# Altium PCB PCB_SensorTapeFlex_v1.PcbDoc (part 1 of 4)
Units mm, origin at the board's own origin, x right, y up, seen from the top; angles counter-clockwise.
Board outline 228.71 x 24.8 mm, 2 copper layers (Top Layer, Bottom Layer); 234 components, 38 nets, 1134 pads, 768 vias.
Unrouted connection lines stored in the file: 1.
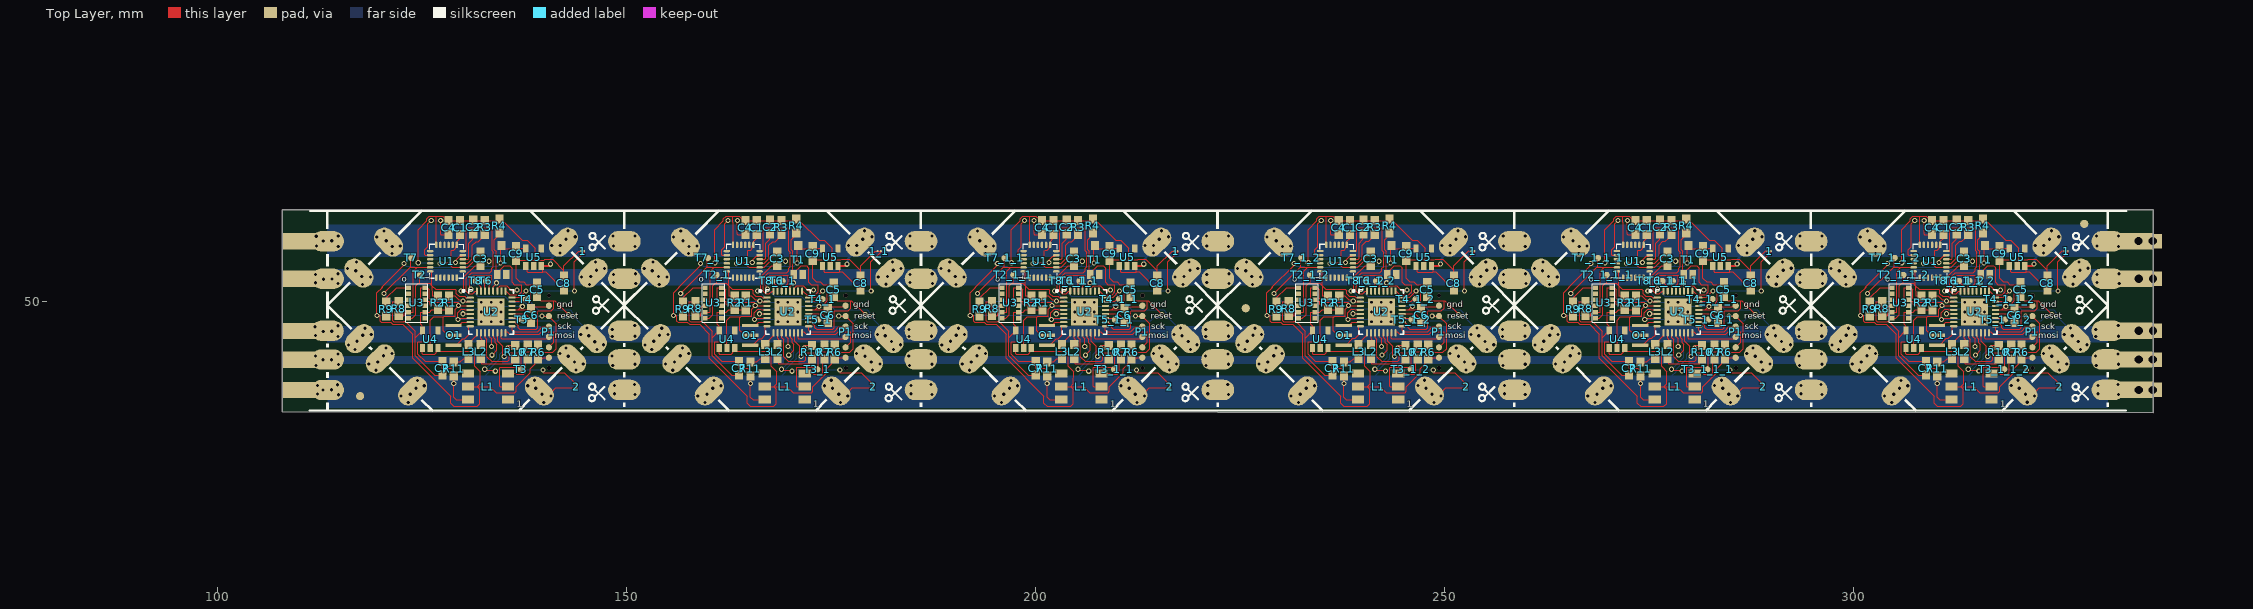
[diagram p0: Top Layer view]
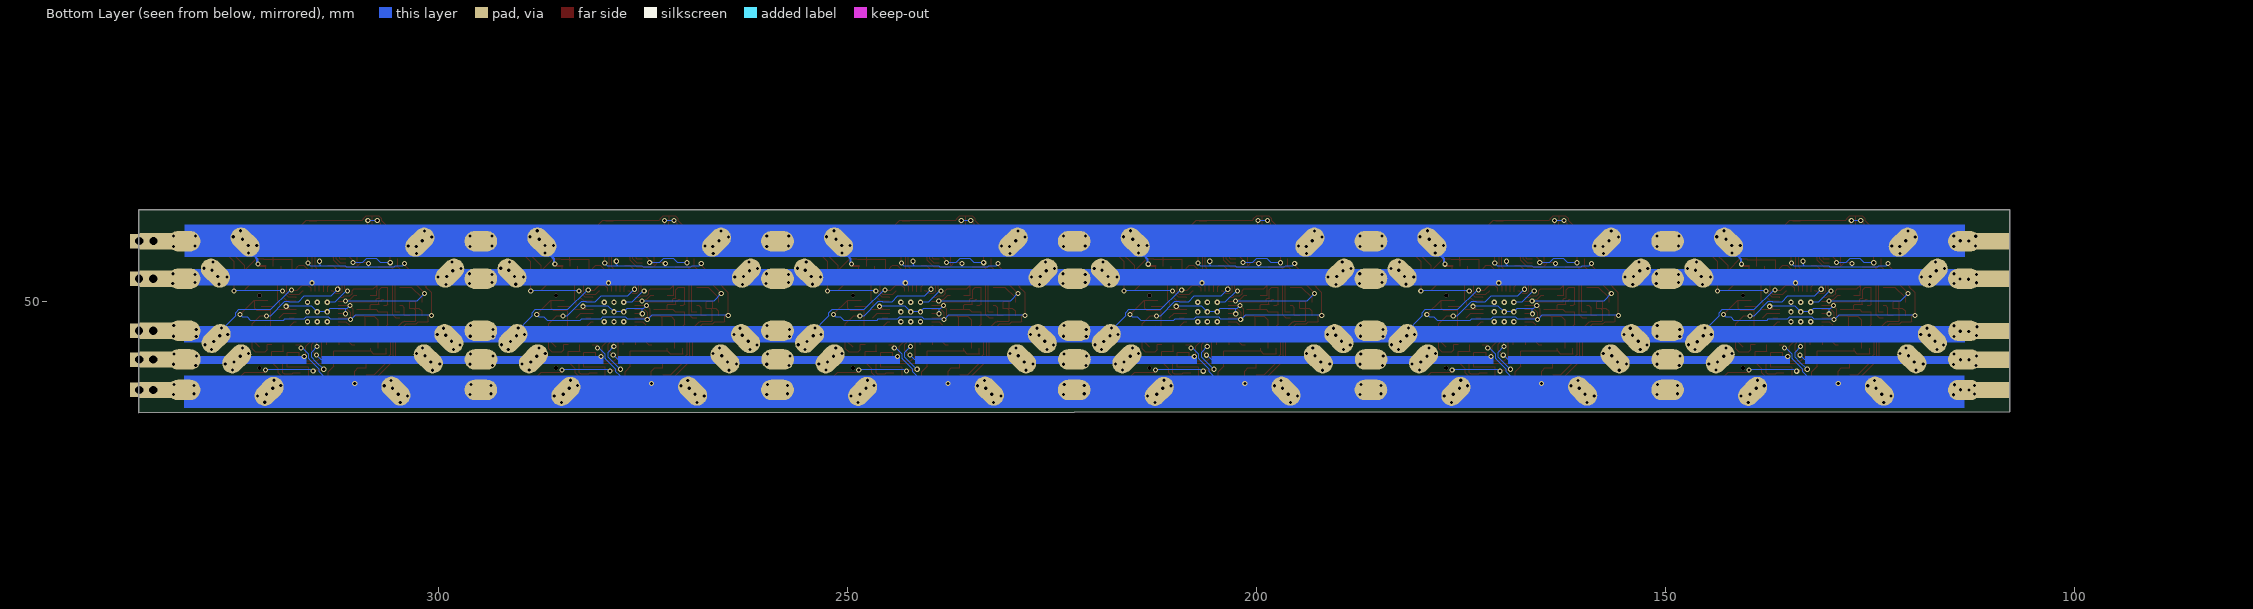
[diagram p1: Bottom Layer view, seen from below]

## Layer stack, top to bottom
Top Solder: solder mask 0.0102, Solder Resist, Dk 3.5
Top Layer: signal copper 0.0356
Dielectric1: dielectric 0.32, FR-4, Dk 4.8
Bottom Layer: signal copper 0.0356
Bottom Solder: solder mask 0.0102, Solder Resist, Dk 3.5

## Board outline
107.934,36.546 336.645,36.453 336.645,61.258 107.957,61.258 107.951,61.251

## Design rules (kind name [scope] priority, off if disabled: settings)
Clearance [All] p1: gap=0.127
MinimumSolderMaskSliver [All] p1: minsoldermaskwidth=0.025
PolygonConnect [All] p1: connectstyle=Relief reliefconductorwidth=0.254 reliefentries=4 polygonreliefangle="90 Angle" airgapwidth=0.254
RoutingVias [All] p1: holewidth=0.381 width=0.635 viastyle="Through Hole" minholewidth=0.381 minwidth=0.635 maxholewidth=0.381 maxwidth=0.635
SolderMaskExpansion [All] p1: expansion=0.102
Width [All] p1: maxlimit=0.254 minlimit=0.127 preferedwidth=0.152
29 further rules are at their usual default settings.

## Classes and differential pairs
component class schematic_sensor_tape_V4_2: 1 C1 C2 C3 C4 C5 C6 C7 C8 C9 L1 L2 L3 O1 P1 R1 R2 R3 R4 R6 R7 R8 R9 R10 R11 T1 T2 T3 T4 T5 T6 T7 T8 U1 U2 U3 U4 U5

## Components (designator, comment, footprint, x,y, rotation, side; value= is the part's Value field where it differs from the comment)
1 "SHORT" SHORT#1 327.008,56.232 r0 top
1 "SHORT" SHORT#1 254.462,56.232 r0 top
1 "SHORT" SHORT#1 290.735,56.232 r0 top
1 "SHORT" SHORT#1 218.19,56.231 r0 top
1 "SHORT" SHORT#2 145.644,56.231 r0 top
1_1 "SHORT" SHORT#1 181.917,56.231 r0 top (schematic designator 1)
2 "SHORT" SHORT#1 325.23,40.642 r90 top
2 "SHORT" SHORT#3 252.684,40.641 r90 top
2 "SHORT" SHORT#1 288.957,40.641 r90 top
2 "SHORT" SHORT#1 216.412,40.64 r90 top
2 "SHORT" SHORT#1 180.139,40.64 r90 top
2 "SHORT" SHORT#1 143.866,40.64 r90 top
C1 "0.1uF" 0603W 311.031,59.057 r90 top
C1 "0.1uF" 0603W 238.485,59.056 r90 top
C1 "0.1uF" 0603W 274.758,59.056 r90 top
C1 "0.1uF" 0603W 202.213,59.055 r90 top
C1 "0.1uF" 0603W 165.94,59.055 r90 top
C1 "0.1uF" 0603W 129.667,59.055 r90 top
C2 "0.1uF" 0603W 312.657,59.107 r90 top
C2 "0.1uF" 0603W 240.111,59.107 r90 top
C2 "0.1uF" 0603W 276.384,59.107 r90 top
C2 "0.1uF" 0603W 203.839,59.106 r90 top
C2 "0.1uF" 0603W 167.566,59.106 r90 top
C2 "0.1uF" 0603W 131.293,59.106 r90 top
C3 "10nF" 0603W 313.546,55.297 r270 top
C3 "10nF" 0603W 241,55.297 r270 top
C3 "10nF" 0603W 277.273,55.297 r270 top
C3 "10nF" 0603W 204.728,55.296 r270 top
C3 "10nF" 0603W 168.455,55.296 r270 top
C3 "10nF" 0603W 132.182,55.296 r270 top
C4 "2200pF" 0603W 309.644,59.052 r90 top
C4 "2200pF" 0603W 237.097,59.051 r90 top
C4 "2200pF" 0603W 273.37,59.051 r90 top
C4 "2200pF" 0603W 200.826,59.05 r90 top
C4 "2200pF" 0603W 164.552,59.05 r90 top
C4 "2200pF" 0603W 128.279,59.05 r90 top
C5 "0.1uF" 0603W 320.455,51.513 r270 top
C5 "0.1uF" 0603W 247.908,51.512 r270 top
C5 "0.1uF" 0603W 284.182,51.512 r270 top
C5 "0.1uF" 0603W 211.637,51.511 r270 top
C5 "0.1uF" 0603W 175.364,51.511 r270 top
C5 "0.1uF" 0603W 139.09,51.511 r270 top
C6 "0.1uF" 0603W 319.718,48.363 r270 top
C6 "0.1uF" 0603W 247.172,48.363 r270 top
C6 "0.1uF" 0603W 283.445,48.363 r270 top
C6 "0.1uF" 0603W 210.9,48.362 r270 top
C6 "0.1uF" 0603W 174.627,48.362 r270 top
C6 "0.1uF" 0603W 138.354,48.362 r270 top
C7 "10uF" 0603W 308.872,41.912 r270 top
C7 "10uF" 0603W 236.326,41.911 r270 top
C7 "10uF" 0603W 272.599,41.911 r270 top
C7 "10uF" 0603W 200.054,41.91 r270 top
C7 "10uF" 0603W 163.781,41.91 r270 top
C7 "10uF" 0603W 127.508,41.91 r270 top
C8 "10uF" 0603W 323.731,52.326 r270 top
C8 "10uF" 0603W 251.185,52.325 r270 top
C8 "10uF" 0603W 287.458,52.325 r270 top
C8 "10uF" 0603W 214.913,52.324 r270 top
C8 "10uF" 0603W 178.64,52.324 r270 top
C8 "10uF" 0603W 142.367,52.324 r270 top
C9 "10uF" 0603W 317.889,55.882 r90 top
C9 "10uF" 0603W 245.343,55.881 r90 top
C9 "10uF" 0603W 281.616,55.881 r90 top
C9 "10uF" 0603W 209.071,55.88 r90 top
C9 "10uF" 0603W 172.798,55.88 r90 top
C9 "10uF" 0603W 136.525,55.88 r90 top
L1 "WS2812" WS2812 312.047,41.277 r0 top
L1 "WS2812" WS2812 239.501,41.276 r0 top
L1 "WS2812" WS2812 275.774,41.276 r0 top
L1 "WS2812" WS2812 203.229,41.275 r0 top
L1 "WS2812" WS2812 166.956,41.275 r0 top
L1 "WS2812" WS2812 130.683,41.275 r0 top
L2 "BLUE" 0603W 313.571,43.944 r270 top
L2 "BLUE" 0603W 241.025,43.943 r270 top
L2 "BLUE" 0603W 277.298,43.943 r270 top
L2 "BLUE" 0603W 204.753,43.942 r270 top
L2 "BLUE" 0603W 168.48,43.942 r270 top
L2 "BLUE" 0603W 132.207,43.942 r270 top
L3 "RED / ORANGE" 0603W 312.073,43.944 r270 top
L3 "RED / ORANGE" 0603W 239.526,43.943 r270 top
L3 "RED / ORANGE" 0603W 275.8,43.943 r270 top
L3 "RED / ORANGE" 0603W 203.255,43.942 r270 top
L3 "RED / ORANGE" 0603W 166.982,43.942 r270 top
L3 "RED / ORANGE" 0603W 130.708,43.942 r270 top
O1 "Resonator SMD" "Resonator SMD" 310.294,46.683 r0 top
O1 "Resonator SMD" "Resonator SMD" 237.747,46.683 r0 top
O1 "Resonator SMD" "Resonator SMD" 274.02,46.683 r0 top
O1 "Resonator SMD" "Resonator SMD" 201.475,46.681 r0 top
O1 "Resonator SMD" "Resonator SMD" 165.202,46.681 r0 top
O1 "Resonator SMD" "Resonator SMD" 128.929,46.681 r0 top
P1 "6 pin smd 1.27mm female" "6pos 1.27mm"#1 313.952,49.659 r90 top
P1 "6 pin smd 1.27mm female" "6pos 1.27mm"#1 241.406,49.658 r90 top
P1 "6 pin smd 1.27mm female" "6pos 1.27mm"#1 277.679,49.658 r90 top
P1 "6 pin smd 1.27mm female" "6pos 1.27mm"#2 205.134,49.657 r90 top
P1 "6 pin smd 1.27mm female" "6pos 1.27mm"#1 168.861,49.657 r90 top
P1 "6 pin smd 1.27mm female" "6pos 1.27mm"#1 132.588,49.657 r90 top
R1 "10k" 0603W 309.697,49.906 r270 top
R1 "10k" 0603W 237.151,49.906 r270 top
R1 "10k" 0603W 273.424,49.906 r270 top
R1 "10k" 0603W 200.879,49.904 r270 top
R1 "10k" 0603W 164.606,49.905 r270 top
R1 "10k" 0603W 128.333,49.904 r270 top
R2 "10k" 0603W 308.34,49.914 r270 top
R2 "10k" 0603W 235.794,49.914 r270 top
R2 "10k" 0603W 272.067,49.914 r270 top
R2 "10k" 0603W 199.522,49.912 r270 top
R2 "10k" 0603W 163.249,49.913 r270 top
R2 "10k" 0603W 126.976,49.912 r270 top
R3 "4.7k" 0603W 314.054,59.082 r90 top
R3 "4.7k" 0603W 241.508,59.082 r90 top
R3 "4.7k" 0603W 277.781,59.082 r90 top
R3 "4.7k" 0603W 205.236,59.08 r90 top
R3 "4.7k" 0603W 168.963,59.081 r90 top
R3 "4.7k" 0603W 132.69,59.08 r90 top
R4 "10K" 0603W 315.857,59.311 r270 top
R4 "10K" 0603W 243.311,59.31 r270 top
R4 "10K" 0603W 279.584,59.31 r270 top
R4 "10K" 0603W 207.039,59.309 r270 top
R4 "10K" 0603W 170.766,59.309 r270 top
R4 "10K" 0603W 134.493,59.309 r270 top
R6 "10k" 0603W 320.582,43.893 r270 top
R6 "10k" 0603W 248.035,43.892 r270 top
R6 "10k" 0603W 284.309,43.892 r270 top
R6 "10k" 0603W 211.764,43.891 r270 top
R6 "10k" 0603W 175.491,43.891 r270 top
R6 "10k" 0603W 139.217,43.891 r270 top
R7 "1K" 0603W 319.312,43.842 r90 top
R7 "1K" 0603W 246.765,43.842 r90 top
R7 "1K" 0603W 283.039,43.842 r90 top
R7 "1K" 0603W 210.494,43.84 r90 top
R7 "1K" 0603W 174.221,43.841 r90 top
R7 "1K" 0603W 137.947,43.84 r90 top
R8 "47K" 0603W 303.538,49.151 r90 top
R8 "47K" 0603W 230.992,49.15 r90 top
R8 "47K" 0603W 267.265,49.15 r90 top
R8 "47K" 0603W 194.72,49.149 r90 top
R8 "47K" 0603W 158.447,49.149 r90 top
R8 "47K" 0603W 122.174,49.149 r90 top
R9 "47K" 0603W 302.014,49.151 r270 top
R9 "47K" 0603W 229.468,49.15 r270 top
R9 "47K" 0603W 265.741,49.15 r270 top
R9 "47K" 0603W 193.196,49.149 r270 top
R9 "47K" 0603W 156.923,49.149 r270 top
R9 "47K" 0603W 120.65,49.149 r270 top
R10 "330" 0603W 317.788,43.867 r270 top
R10 "330" 0603W 245.241,43.867 r270 top
R10 "330" 0603W 281.515,43.867 r270 top
R10 "330" 0603W 208.97,43.866 r270 top
R10 "330" 0603W 172.697,43.866 r270 top
R10 "330" 0603W 136.423,43.866 r270 top
R11 "330" 0603W 310.269,41.785 r90 top
R11 "330" 0603W 237.723,41.784 r90 top
R11 "330" 0603W 273.996,41.784 r90 top
R11 "330" 0603W 201.451,41.783 r90 top
R11 "330" 0603W 165.178,41.783 r90 top
R11 "330" 0603W 128.905,41.783 r90 top
T1 "TEMPT6000" TEMP6000 315.984,54.358 r90 top
T1 "TEMPT6000" TEMP6000 243.438,54.357 r90 top
T1 "TEMPT6000" TEMP6000 279.711,54.357 r90 top
T1 "TEMPT6000" TEMP6000 207.166,54.356 r90 top
T1 "TEMPT6000" TEMP6000 170.893,54.356 r90 top
T1 "TEMPT6000" TEMP6000 134.62,54.356 r90 top
T2 "" "TEST POINT SMD SUPER SMALL" 124.765,53.289 r0 top
T2_1 "" "TEST POINT SMD SUPER SMALL" 161.038,53.289 r0 top (schematic designator T2)
T2_1_1 "" "TEST POINT SMD SUPER SMALL" 197.311,53.289 r0 top (schematic designator T2)
T2_1_1_1 "" "TEST POINT SMD SUPER SMALL" 269.856,53.29 r0 top (schematic designator T2)
T2_1_1_2 "" "TEST POINT SMD SUPER SMALL" 306.129,53.291 r0 top (schematic designator T2)
T2_1_2 "" "TEST POINT SMD SUPER SMALL" 233.583,53.29 r0 top (schematic designator T2)
T3 "" "TEST POINT SMD SUPER SMALL" 137.084,41.758 r0 top
T3_1 "" "TEST POINT SMD SUPER SMALL" 173.357,41.758 r0 top (schematic designator T3)
T3_1_1 "" "TEST POINT SMD SUPER SMALL" 209.63,41.758 r0 top (schematic designator T3)
T3_1_1_1 "" "TEST POINT SMD SUPER SMALL" 282.175,41.759 r0 top (schematic designator T3)
T3_1_1_2 "" "TEST POINT SMD SUPER SMALL" 318.448,41.759 r0 top (schematic designator T3)
T3_1_2 "" "TEST POINT SMD SUPER SMALL" 245.902,41.759 r0 top (schematic designator T3)
T4 "" "TEST POINT SMD SUPER SMALL" 137.694,50.343 r0 top
T4_1 "" "TEST POINT SMD SUPER SMALL" 173.967,50.343 r0 top (schematic designator T4)
T4_1_1 "" "TEST POINT SMD SUPER SMALL" 210.24,50.343 r0 top (schematic designator T4)
T4_1_1_1 "" "TEST POINT SMD SUPER SMALL" 282.785,50.344 r0 top (schematic designator T4)
T4_1_1_2 "" "TEST POINT SMD SUPER SMALL" 319.059,50.345 r0 top (schematic designator T4)
T4_1_2 "" "TEST POINT SMD SUPER SMALL" 246.512,50.344 r0 top (schematic designator T4)
T5 "" "TEST POINT SMD SUPER SMALL" 137.185,47.828 r0 top
T5_1 "" "TEST POINT SMD SUPER SMALL" 173.459,47.828 r0 top (schematic designator T5)
T5_1_1 "" "TEST POINT SMD SUPER SMALL" 209.732,47.828 r0 top (schematic designator T5)
T5_1_1_1 "" "TEST POINT SMD SUPER SMALL" 282.277,47.829 r0 top (schematic designator T5)
T5_1_1_2 "" "TEST POINT SMD SUPER SMALL" 318.55,47.83 r0 top (schematic designator T5)
T5_1_2 "" "TEST POINT SMD SUPER SMALL" 246.003,47.829 r0 top (schematic designator T5)
T6 "" "TEST POINT SMD SUPER SMALL" 132.842,52.553 r0 top
T6_1 "" "TEST POINT SMD SUPER SMALL" 169.115,52.553 r0 top (schematic designator T6)
T6_1_1 "" "TEST POINT SMD SUPER SMALL" 205.388,52.553 r0 top (schematic designator T6)
T6_1_1_1 "" "TEST POINT SMD SUPER SMALL" 277.933,52.554 r0 top (schematic designator T6)
T6_1_1_2 "" "TEST POINT SMD SUPER SMALL" 314.206,52.554 r0 top (schematic designator T6)
T6_1_2 "" "TEST POINT SMD SUPER SMALL" 241.66,52.554 r0 top (schematic designator T6)
T7 "" "TEST POINT SMD SUPER SMALL" 123.698,55.372 r0 top
T7_1 "" "TEST POINT SMD SUPER SMALL" 159.971,55.372 r0 top (schematic designator T7)
T7_1_1 "" "TEST POINT SMD SUPER SMALL" 196.244,55.372 r0 top (schematic designator T7)
T7_1_1_1 "" "TEST POINT SMD SUPER SMALL" 268.789,55.373 r0 top (schematic designator T7)
T7_1_1_2 "" "TEST POINT SMD SUPER SMALL" 305.062,55.374 r0 top (schematic designator T7)
T7_1_2 "" "TEST POINT SMD SUPER SMALL" 232.516,55.373 r0 top (schematic designator T7)
T8 "" "TEST POINT SMD SUPER SMALL" 131.572,52.553 r0 top
T8_1 "" "TEST POINT SMD SUPER SMALL" 167.845,52.553 r0 top (schematic designator T8)
T8_1_1 "" "TEST POINT SMD SUPER SMALL" 204.118,52.553 r0 top (schematic designator T8)
T8_1_1_1 "" "TEST POINT SMD SUPER SMALL" 276.663,52.554 r0 top (schematic designator T8)
T8_1_1_2 "" "TEST POINT SMD SUPER SMALL" 312.936,52.554 r0 top (schematic designator T8)
T8_1_2 "" "TEST POINT SMD SUPER SMALL" 240.39,52.554 r0 top (schematic designator T8)
U1 "MPU_6500" QFN24 308.364,53.723 r90 top
U1 "MPU_6500" QFN24 235.818,53.722 r90 top
U1 "MPU_6500" QFN24 272.091,53.722 r90 top
U1 "MPU_6500" QFN24 199.546,53.721 r90 top
U1 "MPU_6500" QFN24 163.273,53.721 r90 top
U1 "MPU_6500" QFN24 127,53.721 r90 top
U2 "ATmega328P-MUR" 32M1-A_M 314.841,48.77 r0 top
U2 "ATmega328P-MUR" 32M1-A_M 242.295,48.769 r0 top
U2 "ATmega328P-MUR" 32M1-A_M 278.568,48.769 r0 top
U2 "ATmega328P-MUR" 32M1-A_M 206.023,48.768 r0 top
U2 "ATmega328P-MUR" 32M1-A_M 169.75,48.768 r0 top
U2 "ATmega328P-MUR" 32M1-A_M 133.477,48.768 r0 top
U3 "VL6180X" VL6180X 305.697,49.913 r0 top
U3 "VL6180X" VL6180X 233.151,49.912 r0 top
U3 "VL6180X" VL6180X 269.424,49.912 r0 top
U3 "VL6180X" VL6180X 196.879,49.911 r0 top
U3 "VL6180X" VL6180X 160.606,49.911 r0 top
U3 "VL6180X" VL6180X 124.333,49.911 r0 top
U4 "MIC5205_VOLTAGE_REG" SOT-23-5 306.84,45.976 r0 top
U4 "MIC5205_VOLTAGE_REG" SOT-23-5 234.294,45.975 r0 top
U4 "MIC5205_VOLTAGE_REG" SOT-23-5 270.567,45.975 r0 top
U4 "MIC5205_VOLTAGE_REG" SOT-23-5 198.022,45.974 r0 top
U4 "MIC5205_VOLTAGE_REG" SOT-23-5 161.749,45.974 r0 top
U4 "MIC5205_VOLTAGE_REG" SOT-23-5 125.476,45.974 r0 top
U5 "MIC5205_VOLTAGE_REG" SOT-23-5 319.479,56.007 r0 top
U5 "MIC5205_VOLTAGE_REG" SOT-23-5 246.933,56.007 r0 top
U5 "MIC5205_VOLTAGE_REG" SOT-23-5 283.206,56.007 r0 top
U5 "MIC5205_VOLTAGE_REG" SOT-23-5 210.661,56.006 r0 top
U5 "MIC5205_VOLTAGE_REG" SOT-23-5 174.388,56.006 r0 top
U5 "MIC5205_VOLTAGE_REG" SOT-23-5 138.115,56.006 r0 top

## Footprints (in the part's own frame and the unit in brackets; to place one, negate y for a bottom-side part, rotate by r counter-clockwise, add the part's x,y. Pads: shape width x height; smd on the part's side, far side on the other; paste and mask are expansions set on the pad)
"6pos 1.27mm"#1 [mil]
  round 30 smd paste-30: 1(-255.18,-312.9) 2(-205.22,-312.81) 3(-155.19,-312.82) 4(-105.18,-312.84) 5(-55.15,-312.85) 6(-5.14,-312.83)
"6pos 1.27mm"#2 [mil]
  round 30 smd paste-158: 1(-255.18,-312.9) 2(-205.22,-312.81) 4(-105.18,-312.84) 5(-55.15,-312.85) 6(-5.14,-312.83)
  round 30 smd paste-158 mask+4: 3(-155.19,-312.82)
32M1-A_M [mm] "QFN, 32-Leads, Body 5x5mm, Pitch 0.5mm, IPC Low Density"
  oval 0.9x0.25 smd: 1(-2.55,1.75) 2(-2.55,1.25) 3(-2.55,0.75) 4(-2.55,0.25) 5(-2.55,-0.25) 6(-2.55,-0.75) 7(-2.55,-1.25) 8(-2.55,-1.75) 17(2.55,-1.75) 18(2.55,-1.25) 19(2.55,-0.75) 20(2.55,-0.25) 21(2.55,0.25) 22(2.55,0.75) 23(2.55,1.25) 24(2.55,1.75)
  oval 0.25x0.9 smd: 9(-1.75,-2.55) 10(-1.25,-2.55) 11(-0.75,-2.55) 12(-0.25,-2.55) 13(0.25,-2.55) 14(0.75,-2.55) 15(1.25,-2.55) 16(1.75,-2.55) 25(1.75,2.55) 26(1.25,2.55) 27(0.75,2.55) 28(0.25,2.55) 29(-0.25,2.55) 30(-0.75,2.55) 31(-1.25,2.55) 32(-1.75,2.55)
  rect 3.3x3.3 smd: 33(0,0)
  silkscreen extent -3.5,-2.73 2.73,2.73, body extent -2.58,-2.58 2.58,2.58, height 1
0603W [mm]
  rect 1.1x1 smd: 1(-0.825,0) 2(0.875,0)
  body extent -0.77,-0.4 0.83,0.4, height 0.8
QFN24 [mm] "pitch 0.5mm"
  oval 0.8x0.3 smd mask+0.07: 1(-0.756,0.231) 2(-0.756,-0.269) 3(-0.756,-0.768) 4(-0.756,-1.268) 5(-0.756,-1.768) 6(-0.755,-2.268) 13(3.244,-2.268) 14(3.244,-1.768) 15(3.244,-1.269) 16(3.244,-0.769) 17(3.244,-0.269) 18(3.244,0.231)
  oval 0.3x0.8 smd mask+0.07: 7(-0.006,-3.018) 8(0.494,-3.018) 9(0.994,-3.018) 10(1.494,-3.018) 11(1.994,-3.018) 12(2.494,-3.018) 19(2.494,0.981) 20(1.994,0.981) 21(1.494,0.981) 22(0.994,0.981) 23(0.494,0.981) 24(-0.006,0.981)
  silkscreen extent -0.9,-3.16 3.38,1.12, body extent -0.76,-3.02 3.24,0.98, height 1.1
"Resonator SMD" [mm]
  rect 2x0.4 smd: 1(-0.05,-1.975) 2(-0.051,-0.775) 3(-0.051,0.425)
  body extent -0.77,-2.35 0.8,0.8, height 1.15
SHORT#1 [mil] "Just a short"
  round 10 smd paste-10 mask+0: 0(-47.05,-0.98) 1(-31.34,-1.18)
  Top Layer lines w5: -45.76,-1.26 -32.69,-1.28
SHORT#2 [mil] "Just a short"
  round 10 smd paste-10 mask+0: 0(-47.05,-0.98)
  round 10 smd paste-20 mask+0: 1(-31.34,-1.18)
  Top Layer lines w5: -45.76,-1.25 -32.69,-1.28
SHORT#3 [mil] "Just a short"
  round 10 smd paste+0 mask-10: 0(-47.05,-0.98)
  round 10 smd paste-10 mask+0: 1(-31.34,-1.18)
  Top Layer lines w5: -45.76,-1.26 -32.69,-1.28
SOT-23-5 [mm]
  rect 0.65x1 smd: 1(-0.4,-1.625) 2(0.55,-1.625) 3(1.5,-1.625) 4(1.5,0.525) 5(-0.4,0.525)
  body extent -0.77,-1.68 1.88,0.58, height 1.1
TEMP6000 [mm] "Ambient Light sensor"
  rect 1.1x1 smd: 1(2.55,-0.125)
  rect 1.1x0.8 smd: 2(-1,0.425) 3(-1,-0.675)
  body extent -1.28,-1.13 2.73,0.87, height 1.05
"TEST POINT SMD SUPER SMALL" [mil]
  round 30 smd paste-30: 0(0,0)
VL6180X [mm] "IR Proximity sensor"
  rect 0.6x0.55 smd mask+0.05: 1(-0.952,1.838) 2(-0.952,1.089) 3(-0.952,0.34) 4(-0.952,-0.41) 5(-0.952,-1.16) 6(-0.952,-1.91) 7(1.049,-1.911) 8(1.049,-1.161) 9(1.049,-0.412) 10(1.049,0.338) 11(1.049,1.087) 12(1.049,1.836)
  silkscreen extent -1.32,-2.41 1.42,2.33, body extent -1.38,-2.41 1.43,2.39, height 0.6
WS2812 [mm] "RGB Led footprint"
  rect 1.5x1 smd: 1(4.857,-3.229) 2(4.857,-1.629) 3(4.857,-0.029) 4(-0.045,-0.029) 5(-0.045,-1.629) 6(-0.045,-3.229)
  body extent -0.08,-4.13 4.92,0.87, height 1

## Part data
C1 C1 C1 C1 C1 C1 C2 C2 C2 C2 C2 C2 C3 C3 C3 C3 C3 C3 C4 C4 C4 C4 C4 C4 C5 C5 C5 C5 C5 C5 C6 C6 C6 C6 C6 C6 C7 C7 C7 C7 C7 C7 C8 C8 C8 C8 C8 C8 C9 C9 C9 C9 C9 C9: library part Capacitor, "SMD Cap 1206"
L2 L2 L2 L2 L2 L2 L3 L3 L3 L3 L3 L3: library part LED, "LED SMD 1206/0603"
O1 O1 O1 O1 O1 O1: "Build in caps"
R1 R1 R1 R1 R1 R1 R2 R2 R2 R2 R2 R2 R3 R3 R3 R3 R3 R3 R4 R4 R4 R4 R4 R4 R6 R6 R6 R6 R6 R6 R7 R7 R7 R7 R7 R7 R8 R8 R8 R8 R8 R8 R9 R9 R9 R9 R9 R9 R10 R10 R10 R10 R10 R10 R11 R11 R11 R11 R11 R11: library part Resistor
T2 T2_1 T2_1_1 T2_1_1_1 T2_1_1_2 T2_1_2 T3 T3_1 T3_1_1 T3_1_1_1 T3_1_1_2 T3_1_2 T4 T4_1 T4_1_1 T4_1_1_1 T4_1_1_2 T4_1_2 T5 T5_1 T5_1_1 T5_1_1_1 T5_1_1_2 T5_1_2 T6 T6_1 T6_1_1 T6_1_1_1 T6_1_1_2 T6_1_2 T7 T7_1 T7_1_1 T7_1_1_1 T7_1_1_2 T7_1_2 T8 T8_1 T8_1_1 T8_1_1_1 T8_1_1_2 T8_1_2: library part "Test point small"
U1 U1 U1 U1 U1 U1: "Gyro / accelerometer combo"
U2 U2 U2 U2 U2 U2: "8-bit AVR Microcontroller, 32KB Flash, 1KB EEPROM, 2KB SRAM, 32-pin MLF, Industrial Grade (-40°C to 85°C)"
U4 U4 U4 U4 U4 U4 U5 U5 U5 U5 U5 U5: "5V LDO SMD"

## Free pads (board coordinates)
  round 1 smd paste-0.762 mask+0.5: 0(117.452,38.476) 0(225.73,49.222) 0(328.242,59.537)
  rect 50x0.1 on Mech13 rot 135 paste+0 mask+0: 1(113.463,49.56)
  rect 60x0.1 on Mech13 rot 45 paste+0 mask+0: 1(113.463,49.56)
  rect 0.05x25 on Mech13 paste+0 mask+0: 1(113.465,46.688) 1(149.738,46.688) 1(186.011,46.689) 1(222.284,46.689) 1(258.556,46.69) 1(294.829,46.69) 1(331.102,46.69)
  rect 60x0.1 on Mech13 rot 135 paste+0 mask+0: 1(149.763,49.56)
  rect 50x0.1 on Mech13 rot 45 paste+0 mask+0: 1(149.763,49.56)
  rect 2.286x1.778 hole 1: 1(334.888,57.429) 1(334.892,39.233) 1(334.894,42.951) 1(334.897,52.832) 1(334.899,46.475) 1(336.617,57.429) 1(336.621,39.233) 1(336.622,42.951) 1(336.626,52.832) 1(336.628,46.475)
  rect 4x2 smd far side: 2(109.973,52.82) 2(109.977,46.441) 2(109.978,42.939) 2(109.985,57.401) 2(109.994,39.221) 2(334.6,52.832) 2(334.603,46.452) 2(334.604,42.95) 2(334.611,57.412) 2(334.62,39.233)
  rect 4x2 smd paste-4: 2(109.977,52.823) 2(109.98,46.443) 2(109.981,42.941) 2(109.988,57.403) 2(109.998,39.224) 2(334.604,52.834) 2(334.607,46.454) 2(334.608,42.952) 2(334.615,57.414) 2(334.624,39.235)
  oval 4x2.5 smd paste-4.013: 3(113.463,46.46) 3(113.471,57.405) 3(113.475,52.825) 3(113.477,42.952) 3(113.482,39.227) 3(149.738,42.96) 3(149.763,39.235) 3(149.763,46.468) 3(149.763,52.835) 3(149.763,57.416) 3(186.011,42.96) 3(186.036,39.235) 3(186.036,46.468) 3(186.036,52.835) 3(186.036,57.416) 3(222.284,42.96) 3(222.309,39.235) 3(222.309,46.468) 3(222.309,52.835) 3(222.309,57.416) 3(258.556,42.961) 3(258.581,39.236) 3(258.581,46.469) 3(258.581,52.836) 3(258.581,57.417) 3(294.829,42.961) 3(294.854,39.236) 3(294.854,46.469) 3(294.854,52.836) 3(294.854,57.417) 3(331.102,42.962) 3(331.128,39.237) 3(331.128,46.47) 3(331.128,52.837) 3(331.128,57.418)
  oval 4x2.5 smd far side: 3(113.463,46.46) 3(113.471,57.405) 3(113.475,52.825) 3(113.477,42.952) 3(113.482,39.227) 3(149.738,42.96) 3(149.763,39.235) 3(149.763,46.468) 3(149.763,52.835) 3(149.763,57.416) 3(186.011,42.96) 3(186.036,39.235) 3(186.036,46.468) 3(186.036,52.835) 3(186.036,57.416) 3(222.284,42.96) 3(222.309,39.235) 3(222.309,46.468) 3(222.309,52.835) 3(222.309,57.416) 3(258.556,42.961) 3(258.581,39.236) 3(258.581,46.469) 3(258.581,52.836) 3(258.581,57.417) 3(294.829,42.961) 3(294.854,39.236) 3(294.854,46.469) 3(294.854,52.836) 3(294.854,57.417) 3(331.102,42.962) 3(331.128,39.237) 3(331.128,46.47) 3(331.128,52.837) 3(331.128,57.418)
  oval 4x2.5 smd far side rot 135: 3(117.294,53.504) 3(120.948,57.307) 3(139.364,39.056) 3(143.33,43.035) 3(145.847,45.517) 3(153.567,53.504) 3(157.221,57.307) 3(175.638,39.056) 3(179.603,43.035) 3(182.12,45.517) 3(189.841,53.504) 3(193.494,57.307) 3(211.911,39.056) 3(215.876,43.035) 3(218.393,45.517) 3(226.112,53.506) 3(229.766,57.308) 3(248.182,39.057) 3(252.148,43.036) 3(254.665,45.518) 3(262.385,53.505) 3(266.039,57.308) 3(284.456,39.057) 3(288.421,43.036) 3(290.938,45.518) 3(298.659,53.506) 3(302.313,57.308) 3(320.729,39.057) 3(324.695,43.037) 3(327.211,45.518)
  oval 4x2.5 smd rot 135 paste-4.013: 3(117.296,53.506) 3(120.945,57.3) 3(139.372,39.102) 3(143.33,43.035) 3(145.847,45.517) 3(153.569,53.506) 3(157.219,57.3) 3(175.645,39.102) 3(179.603,43.035) 3(182.12,45.517) 3(189.842,53.506) 3(193.492,57.3) 3(211.918,39.102) 3(215.876,43.035) 3(218.393,45.517) 3(226.114,53.507) 3(229.764,57.301) 3(248.19,39.103) 3(252.148,43.036) 3(254.665,45.518) 3(262.387,53.507) 3(266.037,57.301) 3(284.463,39.103) 3(288.421,43.036) 3(290.938,45.518) 3(298.66,53.508) 3(302.31,57.302) 3(320.736,39.104) 3(324.695,43.037) 3(327.211,45.518)
  oval 4x2.5 smd far side rot 45: 3(117.396,45.503) 3(119.913,43.021) 3(123.871,39.089) 3(142.299,57.312) 3(145.948,53.518) 3(153.669,45.503) 3(156.186,43.022) 3(160.144,39.089) 3(178.572,57.312) 3(182.222,53.518) 3(189.942,45.503) 3(192.459,43.022) 3(196.417,39.089) 3(214.845,57.312) 3(218.495,53.518) 3(226.214,45.505) 3(228.731,43.023) 3(232.689,39.09) 3(251.117,57.313) 3(254.766,53.519) 3(262.487,45.504) 3(265.004,43.023) 3(268.962,39.09) 3(287.39,57.313) 3(291.04,53.519) 3(298.76,45.505) 3(301.277,43.023) 3(305.235,39.09) 3(323.663,57.313) 3(327.313,53.519)
  oval 4x2.5 smd rot 45 paste-4.013: 3(117.397,45.505) 3(119.914,43.023) 3(123.872,39.105) 3(142.299,57.312) 3(145.948,53.518) 3(153.671,45.505) 3(156.187,43.023) 3(160.145,39.105) 3(178.572,57.312) 3(182.222,53.518) 3(189.944,45.505) 3(192.461,43.023) 3(196.418,39.105) 3(214.845,57.312) 3(218.495,53.518) 3(226.215,45.506) 3(228.732,43.024) 3(232.69,39.107) 3(251.117,57.313) 3(254.766,53.519) 3(262.489,45.506) 3(265.005,43.024) 3(268.963,39.106) 3(287.39,57.313) 3(291.04,53.519) 3(298.762,45.507) 3(301.279,43.025) 3(305.236,39.107) 3(323.663,57.313) 3(327.313,53.519)

## Via types
v1: diameter 0.635, hole 0.381, Top Layer to Bottom Layer, tented both sides, 572 vias
v2: diameter 0.635, hole 0.4, Top Layer to Bottom Layer, tented both sides, 130 vias
v3: diameter 0.66, hole 0.33, Top Layer to Bottom Layer, tented both sides, 54 vias
v4: diameter 0.508, hole 0.508, Top Layer to Bottom Layer, tented both sides, 12 vias

## Nets (pads, with @x,y where several pads share a name; then routed paths per layer and width w, separated by ;. In a path a pad name is that pad's centre, name@x,y a point inside that pad or via, vN(x,y) a via of type N, cw(c..) or ccw(c..) an arc to the next point about the centre after c; other vN are vias at no path point)
2_8V: C7.2@127.508,41.035 R1.2@128.333,49.029 R2.2@126.976,49.037 R8.2@122.174,50.024 R9.2@120.65,48.274 U3.8@125.382,48.75 U3.10@125.382,50.249 U4.5@125.076,46.499 | length 27.1
  Top Layer w0.152: R9.2@120.65,48.274 120.65,48.831 120.993,49.174 121.437,49.174 ; 124.206,45.568 124.206,46.406 123.114,47.498 122.986,47.498 122.854,47.63 122.79,47.567 122.769,47.545 121.579,47.545 121.445,47.679 121.445,48.969 121.544,49.068 121.437,49.174 ; 124.206,45.618 124.206,43.409 126.594,41.021 127.508,41.021 C7.2@127.508,41.035 ; 124.218,45.641 U4.5@125.076,46.499 125.076,47.041 124.841,47.276 124.841,48.724 124.866,48.75 U3.8@125.382,48.75 125.952,48.75 126.238,49.036 127,49.036 127,49.593 126.941,49.653 125.996,49.653 125.95,49.699 125.95,50.063 125.912,50.101 125.606,50.101 125.606,50.249 U3.10@125.382,50.249 ; R2.2@126.993,49.035 R1.2@128.644,49.035 ; 121.437,49.174 122.149,49.174 122.174,49.2 R8.2@122.174,50.024 121.463,50.024 121.437,49.999 121.437,49.174
A0: T4.0 U2.23@136.027,50.018 | length 1.6
  Top Layer w0.152: U2.23@136.119,50.059 137.147,50.059 T4.0@137.531,50.442
A3: U2.26@134.727,51.318
A6: T5.0 U2.19@136.027,48.018 | length 0.6
  Top Layer w0.152: U2.19@136.306,48.01 T5.0@136.931,48.01
CUT1: 1.1@144.848,56.201 U2.24@136.027,50.518 | length 13.4
  Top Layer w0.152: U2.24@136.027,50.518 136.076,50.567 136.977,50.567 v1(137.744,51.333) ; v1(143.662,51.333) 143.637,51.359 143.637,54.889 144.902,56.155 1.1@144.902,56.201
  Bottom Layer w0.152: v1(137.744,51.333) v1(143.662,51.333)
CUT2: 2.1@143.896,39.844 U2.12@133.227,46.218 | length 16.5
  Top Layer w0.152: v1@132.867,41.656 v1@134.123,41.656 ; U2.12@133.198,45.822 133.528,45.491 v1@133.528,44.653 ; v1@139.827,41.351 142.435,41.351 2.1@143.916,39.87
  Bottom Layer w0.152: v1@132.715,41.758 133.579,42.621 134.188,43.231 134.188,43.866 133.566,44.488 v1@133.464,44.488 ; 134.264,41.681 v1@139.776,41.681
  other v1: 133.985,41.529 139.827,41.656 132.69,41.758 133.502,44.526
DI: L1.2@135.54,39.646 T3.0 U2.11@132.727,46.218 | length 16.1
  Top Layer w0.152: U2.11@132.727,46.218 132.727,45.632 132.944,45.415 132.944,43.299 133.533,42.71 135.499,42.71 135.687,42.898 135.687,43.815 ; L1.2@135.54,39.646 134.569,39.646 134.544,39.671 134.544,41.961 134.569,41.986 136.525,41.986 ; 135.687,43.79 137.16,43.79 137.16,42.008 136.546,42.008
GND: 1.0@144.449,56.206 2.0@143.891,39.445 C1.2@129.667,59.93 C2.2@131.293,59.981 C3.2@132.182,54.421 C4.2@128.279,59.925 C5.1@139.09,52.336 C6.1@138.354,49.187 C7.1@127.508,42.735 C8.1@142.367,53.149 C9.1@136.525,55.055 L1.6@130.638,38.046 O1.2@128.878,45.907 P1.6@140.534,49.526 pad.2@109.994,39.221 pad.2@109.998,39.224 pad.3@113.482,39.227 pad.3@123.871,39.089 pad.3@123.872,39.105 pad.3@139.364,39.056 pad.3@139.372,39.102 pad.3@149.763,39.235 R3.2@132.69,59.955 R4.1@134.493,60.134 R10.1@136.423,44.691 R11.1@128.905,40.958 U1.11@130.018,55.715 U1.18@126.769,56.965 U2.3@130.927,49.518 U2.5@130.927,48.518 U2.21@136.027,49.018 U2.33@133.477,48.768 U3.9@125.382,49.499 U3.12@125.382,51.747 U4.2@126.026,44.349 U5.2@138.665,54.381 | length 122.9
  Top Layer w0.152: v1(124.562,54.788) 124.536,54.762 124.536,58.834 125.599,59.898 125.599,60.17 125.919,60.49 126.192,60.49 126.197,60.495 126.695,60.495 ; U3.9@125.382,49.499 125.075,49.499 124.841,49.733 124.841,51.722 124.866,51.747 U3.12@125.382,51.747 125.665,51.747 125.911,51.502 125.911,50.47 125.975,50.406 126.208,50.406 126.271,50.343 126.271,49.987 126.301,49.957 129.443,49.957 ; U4.2@126.026,44.349 126.026,45.085 ; 126.647,60.49 127.531,60.49 127.851,60.17 127.851,60.095 128.016,59.93 C1.2@129.667,59.93 130.48,59.93 ; 126.746,60.401 126.746,59.751 126.759,59.738 126.759,59.718 126.769,59.708 U1.18@126.769,56.965 ; O1.2@128.393,45.914 128.164,45.914 127.635,46.444 127.635,46.469 127.61,46.495 127.61,48.082 127.706,48.179 ; v1(129.121,54.796) 129.121,55.103 129.611,55.594 129.897,55.594 U1.11@130.018,55.715 ; 129.43,49.921 129.522,49.829 129.522,49.518 U2.3@130.927,49.518 ; v1@129.484,49.545 129.057,49.118 129.057,48.257 129.019,48.219 127.746,48.219 127.706,48.179 ; v1(129.794,51.333) 129.794,51.352 129.826,51.384 129.896,51.384 130.137,51.625 130.137,53.048 131.51,54.421 C3.2@132.182,54.421 ; v1(130.02,48.539) 130.04,48.518 U2.5@130.927,48.518 ; 130.454,59.905 130.48,59.93 ; L1.6@130.638,38.046 129.222,38.046 128.905,38.364 v1(128.905,40.005) R11.1@128.905,40.958 128.905,41.542 128.588,41.859 127.533,41.859 127.508,41.885 C7.1@127.508,42.735 125.394,42.735 124.522,43.607 124.522,45.085 124.548,45.11 126.001,45.11 126.026,45.085 ; R4.1@134.493,59.88 133.629,59.88 133.579,59.93 ; v1(135.484,44.348) 135.484,44.64 135.547,44.704 R10.1@136.144,44.704 ; U2.21@136.027,49.018 136.807,49.018 ; v1(137.287,49.454) 137.243,49.454 136.807,49.018 ; 137.795,52.12 137.464,52.451 136.97,52.451 136.525,52.896 136.525,55.118 138.828,55.118 ; 137.849,52.103 C5.1@139.319,52.103 ; C6.1@138.074,49.644 138.074,49.886 138.303,50.114 138.303,52.103 ; C6.1@138.252,49.018 136.807,49.018 ; C6.1@138.746,49.403 P1.6@140.335,49.403 ; U5.2@138.853,54.382 138.853,55.093 138.828,55.118 ; 138.884,55.052 138.884,56.55 137.903,57.531 137.287,57.531 134.888,59.93 133.579,59.93 ; pad.3@140.868,38.964 141.376,39.472 2.0@143.891,39.472 ; 142.312,53.894 140.985,55.221 140.057,55.221 139.954,55.118 138.828,55.118 ; C8.1@142.367,53.149 142.367,54.396 144.189,56.217 ; 126.026,45.085 126.026,47.769 126.441,48.184 127.584,48.184 127.706,48.179 ; 130.48,59.93 133.579,59.93
  Bottom Layer w0.152: v1(124.562,54.788) 124.566,54.783 125.702,54.783 126.189,55.27 127.486,55.27 127.973,54.783 129.108,54.783 v1(129.121,54.796) ; v1(128.905,40.005) 131.94,40.005 132.74,40.805 132.74,40.97 133.247,41.477 133.247,41.759 134.525,43.036 134.544,43.055 134.544,43.068 134.531,43.081 134.531,43.624 135.255,44.348 v1(135.484,44.348) ; v1@129.441,49.539 129.511,49.539 129.888,49.163 130.013,49.163 130.02,49.156 130.02,49.133 ; v1(129.794,51.333) 129.794,51.352 129.826,51.384 129.921,51.384 131.337,49.968 v3(132.277,49.968) ; v1@130.131,48.519 130.112,48.539 v1(130.02,48.539) 130.02,49.133 ; v1(137.287,49.454) 137.309,49.476 134.166,49.476 133.475,48.785 132.294,48.785 131.945,49.133 130.02,49.133
  other v1: 123.341,37.707 139.903,37.719 122.452,38.495 140.792,38.506 114.799,38.65 151.079,38.659 112.259,38.752 148.539,38.76 125.297,39.739 137.947,39.751 112.259,39.768 148.539,39.776 114.697,39.87 150.978,39.878 124.459,40.4 138.786,40.411 129.489,49.555
  other v2: 123.583,38.689 139.685,38.718 112.92,39.22 113.953,39.247 138.936,39.429 124.295,39.439
  other v3: 132.277,47.568 133.477,47.568 134.677,47.568 132.277,48.768 133.477,48.768 134.677,48.768 133.477,49.968 134.677,49.968
INT_IMU: U1.12@130.018,56.215 U2.32@131.727,51.318 | length 18.5
  Top Layer w0.152: U1.12@130.018,56.215 130.429,56.215 130.454,56.24 130.454,59.08 133.579,59.08 133.579,56.236 133.756,56.058 133.756,54.28 133.566,54.09 133.566,53.799 133.311,53.543 131.496,53.543 131.089,53.543 130.454,52.908 130.454,51.943 130.442,51.93 130.442,51.31 130.762,50.99 131.214,50.99 131.542,51.318 U2.32@131.727,51.318 U2.32@131.75,51.341
LED1: L2.1@132.207,44.767 U2.10@132.227,46.218 | length 1.5
  Top Layer w0.152: U2.10@132.227,46.218 132.227,45.522 132.334,45.415 L2.1@132.334,44.767
LED2: L3.1@130.708,44.767 U2.9@131.727,46.218 | length 1.8
  Top Layer w0.152: L3.1@130.81,44.767 130.81,44.981 131.727,45.898 U2.9@131.727,46.218
LIGHTSENSE: R4.2@134.493,58.434 T1.2@134.195,53.356 U2.25@135.227,51.318 | length 14.4
  Top Layer w0.152: T1.2@134.195,53.529 135.086,54.42 135.763,54.42 135.922,54.262 136.049,54.134 136.049,52.38 136.325,52.103 137.135,52.103 ; T1.2@134.457,52.975 134.068,52.975 134.068,56.21 133.883,56.394 133.883,57.57 R4.2@134.493,58.18 ; U2.25@135.227,51.318 135.317,51.318 135.763,50.872 136.851,50.872 137.185,51.206 137.185,52.095
MISO: P1.2@140.533,44.444 U2.16@135.227,46.218 | length 8.4
  Top Layer w0.152: U2.16@135.227,46.218 135.227,46.33 135.433,46.33 135.738,46.025 139.344,46.025 139.649,46.33 141.122,46.33 141.148,46.304 141.148,45.059 P1.2@140.533,44.444
MOSI: P1.3@140.534,45.715 U2.15@134.727,46.218 | length 6.5
  Top Layer w0.152: U2.15@134.727,46.218 134.727,45.542 134.752,45.517 P1.3@140.538,45.517
NetC2_1: C2.1@131.293,58.281 U1.10@130.018,55.215 | length 3.5
  Top Layer w0.152: U1.10@130.018,55.215 130.653,55.215 130.759,55.321 130.759,57.175 131.242,57.658 C2.1@131.242,57.861
NetC4_1: C4.1@128.279,58.225 U1.20@126.019,55.715 | length 8.7
  Top Layer w0.152: U1.20@126.019,55.715 125.4,55.715 125.374,55.74 125.374,56.382 125.73,56.738 125.73,59.528 v1(126.146,59.944) ; v1(127.305,59.944) 127.305,59.08 127.305,58.255 127.33,58.23 C4.1@128.016,58.23
  Bottom Layer w0.152: v1(126.146,59.944) v1(127.305,59.944)
NetC6_2: C6.2@138.354,47.487 U2.20@136.027,48.518 | length 2.4
  Top Layer w0.152: U2.20@136.027,48.518 136.652,48.518 136.631,48.539 137.617,48.539 C6.2@138.176,47.981
NetL1_3: L1.3@135.54,41.246 R7.1@137.947,43.015 | length 4.5
  Top Layer w0.152: L1.3@135.54,41.246 136.504,41.246 136.627,41.123 137.49,41.123 137.719,41.351 R7.1@137.719,43.078 ; R7.1@137.668,43.054 137.668,42.596 R7.1@137.672,42.596
NetL2_2: L2.2@132.207,43.067 R10.2@136.423,42.991 | length 5
  Top Layer w0.152: L2.2@132.334,43.067 132.334,42.431 132.359,42.405 136.106,42.405 136.144,42.443 R10.2@136.144,43.004
NetL3_2: L3.2@130.708,43.067 R11.2@128.905,42.658 | length 2.1
  Top Layer w0.152: R11.2@128.905,42.658 129.69,42.658 130.099,43.067 L3.2@130.81,43.067
NetO1_1: O1.1@128.879,44.706 U2.8@130.927,47.018 | length 3.7
  Top Layer w0.152: O1.1@128.879,44.706 129.191,44.706 130.005,45.52 130.269,45.52 130.735,45.986 ; 130.708,45.969 130.708,47.018 U2.8@130.927,47.018
NetO1_3: O1.3@128.879,47.106 U2.7@130.927,47.518 | length 1.6
  Top Layer w0.152: O1.3@129.535,47.136 129.917,47.518 U2.7@130.927,47.518
NetR3_1: R3.1@132.69,58.255 U1.9@130.018,54.715 | length 4.9
  Top Layer w0.152: U1.9@130.018,54.715 130.61,54.715 131.166,55.27 131.166,56.921 131.623,57.379 131.928,57.379 132.334,57.785 R3.1@132.664,57.785
NetR8_1: R8.1@122.174,48.324 U3.4@123.381,49.501 | length 2.2
  Top Layer w0.152: R8.1@122.174,48.324 122.809,48.324 122.834,48.349 122.834,49.276 123.059,49.501 U3.4@123.381,49.501
NetR9_1: R9.1@120.65,49.974 U3.1@123.381,51.749 | length 3.8
  Top Layer w0.152: R9.1@120.65,49.974 120.65,50.479 121.92,51.749 U3.1@123.381,51.749
P2P_RX: pad.2@109.978,42.939 pad.2@109.981,42.941 pad.3@113.477,42.952 pad.3@119.913,43.021 pad.3@119.914,43.023 U2.13@133.727,46.218 | length 4
  Top Layer w0.152: v1@133.706,43.612 134.188,44.094 134.188,44.806 133.985,45.009 133.985,45.441 133.807,45.618 133.807,45.771 133.727,45.851 U2.13@133.727,46.091
  Bottom Layer w0.152: 132.817,42.951 132.978,42.944 v1@133.706,43.612
  other v1: 119.404,41.644 112.075,42.206 114.818,42.359 118.515,42.406 111.999,43.375 133.579,43.485 114.742,43.603 121.36,43.676 120.598,44.337
  other v2: 119.61,42.65 112.92,42.908 113.953,42.936 120.321,43.4
P2P_TX: pad.3@143.33,43.035 pad.3@149.738,42.96 U2.14@134.227,46.218 | length 3
  Top Layer w0.152: U2.14@134.227,46.218 134.29,46.155 134.29,45.161 134.899,44.552 v1@134.899,43.485
  other v1: 143.84,41.656 148.336,42.215 151.079,42.367 144.729,42.418 135.077,43.307 148.26,43.383 151.003,43.612 141.884,43.688 142.646,44.348
  other v2: 143.666,42.646 142.916,43.357
RESET: P1.5@140.534,48.256 R6.1@139.217,44.716 U2.29@133.227,51.318 | length 25.1
  Top Layer w0.152: v1@130.847,51.751 130.847,52.818 131.267,53.238 133.553,53.238 ; v1(130.988,51.537) 131.115,51.41 131.115,51.689 v1@131.101,51.675 ; U2.29@133.227,51.318 133.227,51.972 133.528,52.273 133.528,53.238 ; R6.1@139.065,44.767 139.598,44.767 139.624,44.742 139.624,44.12 139.929,43.815 141.021,43.815 141.453,44.247 141.453,47.338 P1.5@140.534,48.256 v1@139.573,48.26
  Bottom Layer w0.152: v1(130.988,51.537) 131.851,50.673 135.128,50.673 135.82,49.981 136.881,49.981 136.896,49.996 137.507,49.996 139.243,48.26 v1@139.573,48.26
  other v1: 139.7,48.26
RX: T6.0 U2.30@132.727,51.318 | length 1.3
  Top Layer w0.152: U2.30@132.719,51.242 132.719,52.328 T6.0@132.867,52.476
SCK: P1.4@140.534,46.985 U2.17@136.027,47.018 | length 5.3
  Top Layer w0.152: U2.17@136.027,47.018 136.027,46.523 136.195,46.355 139.141,46.355 139.776,46.99 ; 139.776,46.985 P1.4@140.534,46.985
SCL: pad.2@109.973,52.82 pad.2@109.977,52.823 pad.3@113.475,52.825 pad.3@117.294,53.504 pad.3@117.296,53.506 pad.3@145.948,53.518 pad.3@149.763,52.835 U2.28@133.727,51.318 | length 1
  Top Layer w0.152: U2.28@133.727,51.318 133.727,51.863 v1@134.01,52.146
  Bottom Layer w0.152: 133.198,52.578 133.223,52.578
  other v1: 117.753,52.134 145.491,52.146 114.763,52.239 151.155,52.248 134.137,52.327 112.02,52.341 148.412,52.349 118.718,53.049 144.526,53.061 112.02,53.357 148.412,53.365 114.738,53.433 151.13,53.442 115.924,54.09 147.32,54.102 116.991,54.852 146.253,54.864
  other v2: 112.974,52.769 114.007,52.796 117.658,53.096 145.645,53.101 116.909,53.807 146.356,53.851
SCL_IMU: R1.1@128.333,50.729 T7.0 U1.23@126.019,54.215 U2.2@130.927,50.018 U3.5@123.381,48.751 | length 26.9
  Top Layer w0.152: v1(120.371,51.029) 123.557,54.215 124.46,54.215 ; U3.5@123.381,48.751 123.952,48.751 123.977,48.777 123.977,53.733 124.46,54.215 ; 123.647,54.216 T7.0@123.647,55.27 ; U1.23@126.019,54.215 124.46,54.215 ; R1.1@128.651,50.736 129.019,50.736 129.518,50.237 129.681,50.237 129.9,50.018 U2.2@130.927,50.018
  Bottom Layer w0.152: v1(120.371,51.029) 121.31,50.089 v1(130.048,50.089)
SDA: pad.2@109.98,46.443 pad.2@109.977,46.441 pad.3@113.463,46.46 pad.3@117.396,45.503 pad.3@117.397,45.505 pad.3@145.847,45.517 pad.3@149.763,46.468 U2.27@134.227,51.318 | length 14.7
  Top Layer w0.152: U2.27@134.227,51.318 134.227,51.643 134.581,51.997 135.373,51.997 135.983,51.387 v1@136.838,51.387
  Bottom Layer w0.152: v1@136.779,51.308 136.838,51.367 136.838,51.387 139.215,49.009 143.152,49.009 143.472,48.689 143.472,48.291 pad.3@145.638,46.125
  other v1: 116.839,44.159 146.406,44.171 116.02,44.744 147.224,44.756 148.285,45.745 114.754,45.788 151.054,45.796 111.99,45.904 118.82,46.013 144.424,46.025 148.285,46.634 118.058,46.775 145.186,46.787 111.95,46.953 114.729,47.083 151.028,47.092 136.627,51.46
  other v2: 146.148,45.14 117.081,45.17 145.398,45.852 117.792,45.92 112.947,46.38 113.98,46.407
SDA_IMU: R2.1@126.976,50.737 T2.0 U1.24@126.019,53.715 U2.1@130.927,50.518 U3.6@123.381,48.001 | length 17.4
  Top Layer w0.152: U3.6@123.381,48.001 123.846,48.001 124.282,48.438 124.282,51.968 124.587,52.273 125.946,52.273 126.238,51.981 ; 124.765,52.261 T2.0@124.765,53.34 ; U1.24@126.019,53.715 126.238,53.715 126.238,51.981 ; R2.1@127,50.736 126.254,50.736 126.238,51.981 ; U2.1@130.927,50.518 130.391,50.518 130.236,50.673 129.562,50.673 129.227,51.008 129.227,51.381 129.071,51.537 126.682,51.537 126.238,51.981
THERMISTORSENSE: U2.22@136.027,49.518
TX: T8.0 U2.31@132.227,51.318 | length 1.6
  Top Layer w0.152: T8.0@131.547,52.502 132.211,51.837 U2.31@132.211,51.216
VCC: C1.1@129.667,58.23 C3.1@132.182,56.121 C5.2@139.09,50.636 C9.2@136.525,56.755 L1.5@130.638,39.646 P1.1@140.536,43.175 R6.2@139.217,43.016 R7.2@137.947,44.715 T1.1@134.745,56.906 U1.8@130.018,54.215 U1.13@129.268,56.965 U2.4@130.927,49.018 U2.6@130.927,48.018 U2.18@136.027,47.518 U4.1@125.076,44.349 U4.3@126.976,44.349 U5.5@137.715,56.531 | length 128.5
  Top Layer w0.152: v1(122.809,54.686) 122.809,54.483 120.117,51.791 120.193,51.791 119.507,51.105 v1(119.507,48.336) 119.921,48.336 119.921,47.629 120.055,47.495 121.198,47.495 121.453,47.241 122.685,47.241 123.876,46.05 123.876,43.104 128.511,38.468 128.511,37.617 128.905,37.224 131.762,37.224 132.08,37.541 132.08,39.329 131.762,39.646 ; U4.1@125.076,44.349 125.076,43.637 125.101,43.612 126.568,43.612 U4.3@126.95,43.994 ; v1@127.137,54.765 128.192,54.765 128.575,54.382 128.741,54.215 U1.8@130.018,54.215 130.619,54.215 131.47,55.067 131.47,55.41 C3.1@132.182,56.121 ; 128.575,54.466 128.575,56.271 128.64,56.336 128.925,56.336 129.147,56.558 129.147,56.843 U1.13@129.268,56.965 129.268,57.379 129.667,57.777 C1.1@129.667,58.23 ; v1@129.37,47.844 129.37,48.694 129.794,49.118 130.177,49.118 130.277,49.018 U2.4@130.927,49.018 ; v1@129.42,47.816 129.622,48.018 U2.6@130.927,48.018 ; L1.5@130.638,39.646 131.762,39.646 ; v1(134.618,54.737) 134.618,56.398 134.721,56.501 137.185,56.501 137.216,56.532 U5.5@137.903,56.532 ; U2.18@136.027,47.518 136.353,47.518 136.779,47.092 136.779,46.863 136.982,46.66 138.963,46.66 139.141,46.838 139.141,48.87 ; R7.2@137.668,44.754 137.668,43.942 137.693,43.917 139.04,43.917 139.065,43.891 139.065,43.067 139.725,43.067 139.834,43.175 P1.1@140.536,43.175 ; R6.2@138.836,42.748 138.836,42.418 138.227,41.808 138.227,41.351 136.518,39.643 136.518,39.051 136.384,38.917 135.78,38.917 135.776,38.913 134.109,38.913 133.375,39.646 131.762,39.646 ; 139.167,48.895 140.83,48.895 141.148,49.212 141.148,50.114 141.122,50.14 ; C5.2@139.534,50.14 141.122,50.14 ; v1(142.926,48.463) 141.249,50.14 141.122,50.14 ; U4.3@126.95,43.994 126.976,44.02 U4.3@126.976,44.349 U4.3@126.95,43.994 ; U4.3@126.95,43.994 126.976,43.967 131.47,43.967 131.47,42.113 132.131,41.453 132.121,40.005 131.762,39.646
  Top Layer w0.254: v1@127.137,54.765 v1(127.207,54.695)
  Bottom Layer w0.152: v1(119.507,48.336) 128.868,48.336 129.334,47.87 131.825,47.87 132.056,48.101 132.498,48.101 132.504,48.095 133.25,48.095 133.256,48.101 133.698,48.101 133.704,48.095 134.45,48.095 134.456,48.101 134.898,48.101 135.129,47.87 137.5,47.87 137.66,47.71 141.588,47.71 142.011,48.133 142.596,48.133 v1(142.926,48.463) ; v1(122.809,54.686) 123.114,54.381 123.99,54.381 124.13,54.242 129.87,54.242 130.01,54.381 134.262,54.381 v1(134.618,54.737) ; 127.197,54.291 v1@127.2,54.691 ; 133.043,54.432 133.198,54.587 v1(133.198,54.966)
  Bottom Layer w0.254: v1@127.207,54.576 v1(127.207,54.695)
  other v1: 129.411,47.839
VIN: C8.2@142.367,51.449 pad.2@109.985,57.401 pad.2@109.988,57.403 pad.3@113.471,57.405 pad.3@120.945,57.3 pad.3@120.948,57.307 pad.3@142.299,57.312 pad.3@149.763,57.416 U5.1@137.715,54.381 U5.3@139.615,54.381 | length 9.1
  Top Layer w0.152: U5.1@137.903,54.382 137.903,53.67 137.928,53.645 139.778,53.645 139.803,53.67 ; U5.3@139.803,54.382 139.803,53.67 ; C8.2@142.367,51.449 140.146,53.67 139.803,53.67
  Top Layer w0.254: U5.3@139.803,54.382 140.488,54.382 v1(140.716,54.61)
  Bottom Layer w0.254: v1(140.716,54.61) 140.817,54.711 140.817,55.244 141.199,55.626
  other v1: 121.343,55.932 141.901,55.98 114.788,56.758 151.079,56.769 112.121,56.809 122.359,56.821 148.412,56.82 140.885,56.869 119.489,57.913 143.755,57.961 112.095,58.028 148.387,58.039 114.788,58.053 151.079,58.064 120.378,58.65 142.866,58.698
  other v2: 121.399,56.757 141.91,56.901 112.947,57.437 113.98,57.464 120.65,57.468 142.621,57.651